# EAGLE board sensor_node_v3 (EAGLE 7.2.0)
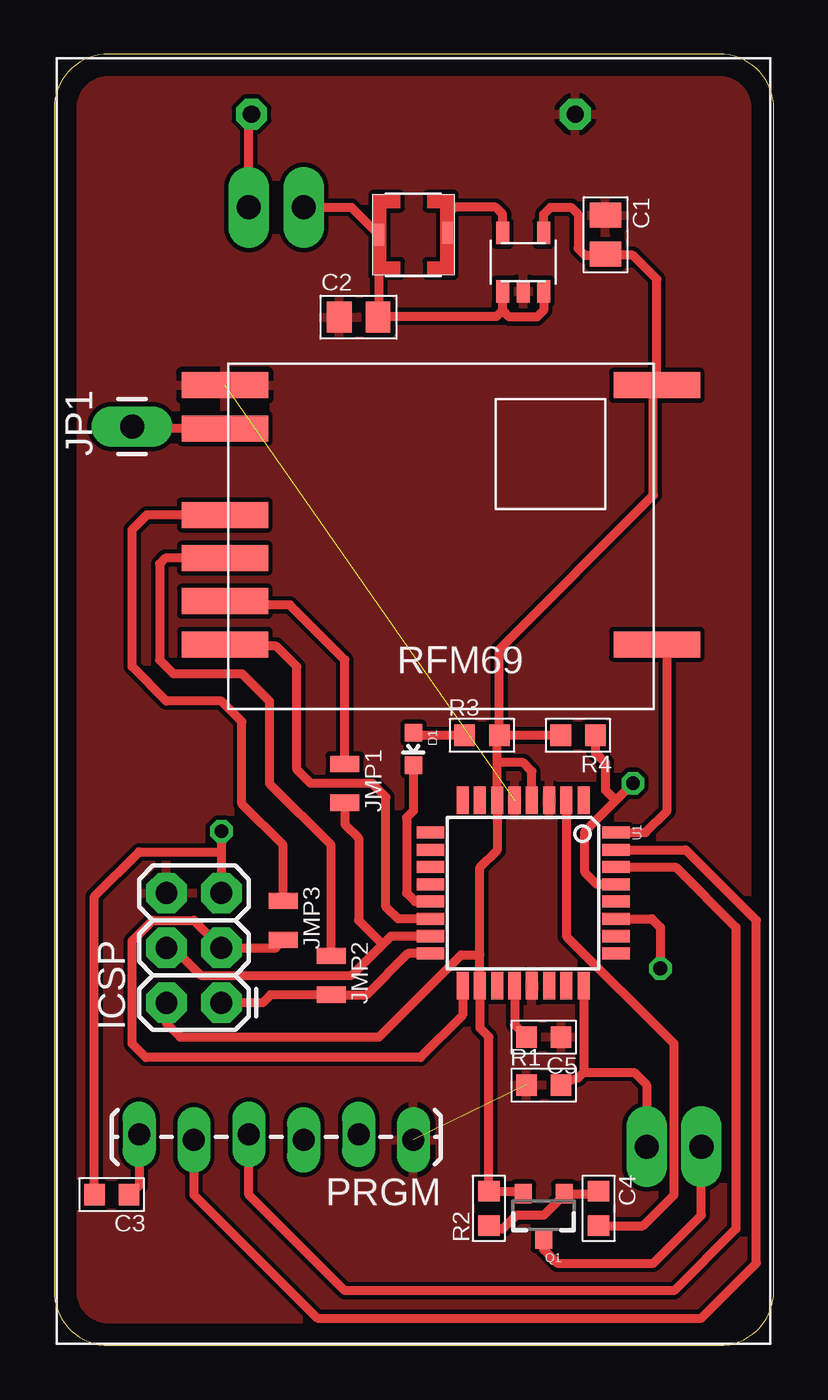
[diagram p0: board, top side]
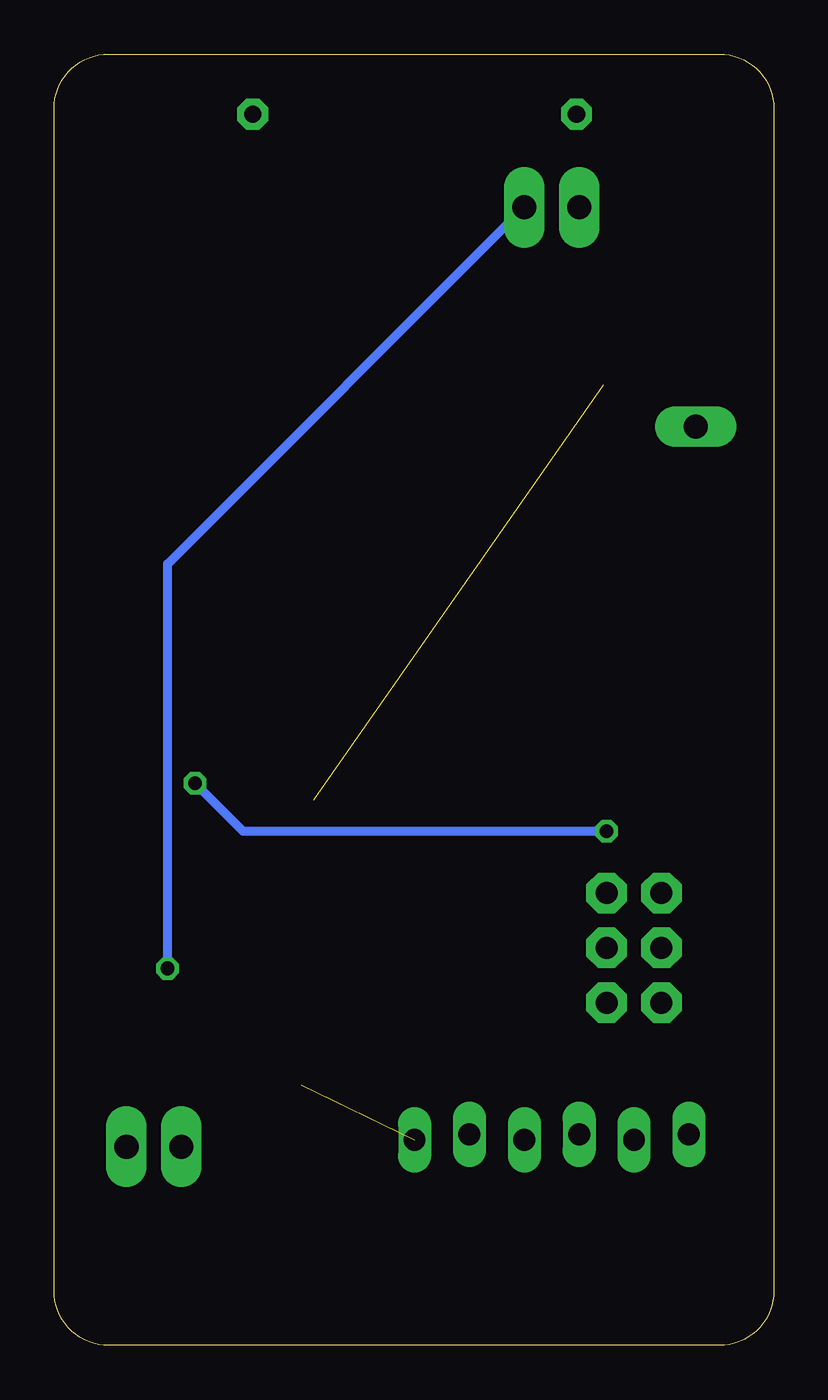
[diagram p1: board, bottom side, seen from below]

Size 33.33 x 59.81 mm. Coordinates in mm from the lower left corner, seen from the top.
Outline: 2.54,0 30.79,0 arc90 33.33,2.54 33.33,57.27 arc90 30.79,59.81 2.54,59.81 arc90 0,57.27 0,2.54 arc90 2.54,0
Copper layers (1*16): Top 0.035mm / dielectric 1.5mm / Bottom 0.035mm
Design rules "default": minimum track width 10mil, minimum drill 24mil, track to track 8mil, track to pad 8mil, pad to pad 8mil, via to via 8mil, smd to smd 8mil, copper to edge 40mil, drill to drill 8mil, minimum pad ring 10mil, minimum via ring 8mil, stop-mask expansion 4mil, vias tented up to drill 0mil, thermal gap 10mil

## Footprints (pad centres in the part's own frame; a part is rotated, then mirrored left to right if it is on the bottom)
C0805-N = smd 1.15 x 1.45: 1 -0.9,0; 2 0.9,0
C0603-N = smd 0.95 x 1: 1 -0.8,0; 2 0.8,0
LED-0603 = smd 0.8 x 0.8: A 0,-0.75; C 0,0.75
2X3 = drill 1.016 pad 1.88 octagon: 1 0,0; 2 0,2.54; 3 2.54,0; 4 2.54,2.54; 5 5.08,0; 6 5.08,2.54
R0805-L = smd 0.75 x 1.35: 1 -0.9,0; 2 0.9,0
1X01_LONGPAD = drill 1.118 pad 1.88 long: 1 0,0
1X02_LONGPADS = drill 1.118 pad 1.88 long: 1 0,0; 2 2.54,0
1X06_LOCK_LONGPADS = drill 1.016 long: 1 0,0; 2 2.54,-0.254; 3 5.08,0; 4 7.62,-0.254; 5 10.16,0; 6 12.7,-0.254
SOT23-3 = smd 0.8 x 0.9: 1 -0.95,-1; 2 0.95,-1; 3 0,1.1
R0603-N = smd 0.95 x 1: 1 -0.8,0; 2 0.8,0
TQFP32-08 = smd 1.27 x 0.559: 1 -4.293,2.8; 2 -4.293,2; 3 -4.293,1.2; 4 -4.293,0.4; 5 -4.293,-0.4; 6 -4.293,-1.2; 7 -4.293,-2; 8 -4.293,-2.8; 17 4.293,-2.8; 18 4.293,-2; 19 4.293,-1.2; 20 4.293,-0.4; 21 4.293,0.4; 22 4.293,1.2; 23 4.293,2; 24 4.293,2.8 | smd 0.559 x 1.27: 9 -2.8,-4.293; 10 -2,-4.293; 11 -1.2,-4.293; 12 -0.4,-4.293; 13 0.4,-4.293; 14 1.2,-4.293; 15 2,-4.293; 16 2.8,-4.293; 25 2.8,4.293; 26 2,4.293; 27 1.2,4.293; 28 0.4,4.293; 29 -0.4,4.293; 30 -1.2,4.293; 31 -2,4.293; 32 -2.8,4.293
KEYSTONEAAHOLDER_2CELL = drill 0.8 pad 1.422 octagon: P$1 -7.493,27.178; P$2 7.493,27.178
SOT23-5 = smd 0.6 x 1.05: P$1 -0.95,-1.35; P$2 0,-1.35; P$3 0.95,-1.35; P$4 0.95,1.35; P$5 -0.95,1.35
COILCRAFT_DO3314 = smd 0.508 x 1.016: P$1 -1.6,-0.1; P$2 1.6,0
RFM69 = smd 4 x 1.2: ANA 10,-5; DIO0 -10,5; GND 10,-7; MISO 10,1; MOSI 10,3; NSS 10,5; SCK 10,-1; VCC -10,-7

## Placement (x,y rotation side)
C1  10uF  [C0805-N]  25.53,51.44 270 top
C2  10uF  [C0805-N]  14.1,47.62 0 top
C3  0.1uF  [C0603-N]  2.67,6.99 180 top
C4  0.1uF  [C0603-N]  25.21,6.35 270 top
C5  0.1uF  [C0603-N]  22.67,14.29 180 top
D1  BLUE  [LED-0603]  16.64,27.62 180 top
ICSP  [2X3]  7.75,15.88 90 top
JMP1  0  [R0805-L]  13.46,26.04 270 top
JMP2  0  [R0805-L]  12.83,17.14 270 top
JMP3  o  [R0805-L]  10.6,19.68 270 top
JP1  M01PTH_LONGPAD  [1X01_LONGPAD]  3.62,42.55 90 top
JP2  THERM  [1X02_LONGPADS]  27.43,9.21 0 top
JP3  PWR_SW  [1X02_LONGPADS]  9.02,52.7 0 top
PRGM  [1X06_LOCK_LONGPADS]  16.64,9.53 180 top
Q1  MOSFET-PCHANNELSMD  [SOT23-3]  22.67,6.03 180 top
R1  10k  [R0603-N]  22.67,12.06 0 top
R2  10k  [R0603-N]  20.13,6.35 90 top
R3  [R0603-N]  19.81,28.26 0 top
R4  10k  [R0603-N]  24.26,28.26 180 top
U1  ATMEGA328P  [TQFP32-08]  21.72,20.95 270 top
U$1  KEYSTONEAAHOLDER_2CELL  [KEYSTONEAAHOLDER_2CELL]  16.64,29.84 0 top
U$2  TPS61097-33  [SOT23-5]  21.72,50.16 0 top
U$3  COILCRAFT_DO3314  [COILCRAFT_DO3314]  16.64,51.44 180 top
U$4  RFM69HW_MIN  [RFM69]  17.91,37.47 180 top

## Library data of the parts
C1-C5 JMP1-JMP3 R1-R4 = passives-7351
D1 = SparkFun-LED; PROD_ID: DIO-08575
ICSP JP1-JP3 PRGM = SparkFun-Connectors
Q1 = SparkFun-DiscreteSemi
U1 = SparkFun-DigitalIC; PROD_ID: IC-09069
U$1-U$3 = myRandomThings
U$4 = hoperf

## Nets
ANT: JP1.1 U$4.ANA
GND: C1.1 C2.1 C5.1 ICSP.6 PRGM.1 R1.1 U1.3 U1.5 U1.21 U$1.P$2 U$2.P$2 U$4.GND
IRQ: U1.32 U$4.DIO0
LED: D1.C U1.13
MISO: ICSP.1 JMP2.2 U1.16
MOSI: ICSP.4 JMP1.2 U1.15
N$1: U$2.P$5 U$3.P$1
N$2: C3.1 PRGM.6
N$3: D1.A R3.1
N$4: JMP1.1 U$4.MOSI
N$5: JMP2.1 U$4.MISO
N$6: JMP3.1 U$4.SCK
N$7: JP3.1 U$1.P$1
N$8: C4.1 Q1.1 R2.1
N$9: C5.2 U1.20
N$11: JP2.2 Q1.3
RST: C3.2 ICSP.5 R4.1 U1.29
RX: PRGM.4 U1.30
SCK: ICSP.3 JMP3.2 U1.17
SS: U1.14 U$4.NSS
THERM: JP2.1 R1.2 U1.24
THERM_EN: C4.2 U1.2
TX: PRGM.5 U1.31
VBAT: C2.2 JP3.2 U1.27 U$2.P$1 U$2.P$3 U$3.P$2
VCC: C1.2 ICSP.2 Q1.2 R2.2 R3.2 R4.2 U1.4 U1.6 U1.18 U$2.P$4 U$4.VCC

## Tracks (layer width: path | path; a pad name or v marks a point on that pad's centre or on a via)
ANT
  Top 0.406: U$4.ANA 3.7,42.47 JP1.1
GND  (2 unrouted)
  pour Top: -1.14,-0.64 34.42,-0.64 34.42,60.33 -1.14,60.33
IRQ
  Top 0.406: U1.32 27.38,23.75 28.38,24.77 28.38,32.31 U$4.DIO0
LED
  Top 0.406: D1.C 16.64,24.77 16.32,24.45 16.32,20.95 16.72,20.55 U1.13
MISO
  Top 0.406: U1.16 16.38,18.16 14.47,16.25 JMP2.2 10.02,16.25 9.65,15.88 ICSP.1
MOSI
  Top 0.406: ICSP.4 5.52,18.41 6.79,17.14 13.78,17.14 15.21,18.57 | 15.21,18.57 15.59,18.95 U1.15 | JMP1.2 13.46,24.13 14.1,23.5 14.1,19.68 15.21,18.57
N$1
  Top 0.406: U$2.P$5 20.77,52.38 20.45,52.7 18.54,52.7 18.22,52.39 18.22,51.55 U$3.P$1
N$2
  Top 0.406: PRGM.6 3.94,7.41 C3.1
N$3
  Top 0.406: R3.1 17.07,28.26 D1.A
N$4
  Top 0.406: JMP1.1 13.46,31.75 10.92,34.29 8.08,34.29 U$4.MOSI
N$5
  Top 0.406: U$4.MISO 5.16,36.47 4.89,36.2 4.89,31.75 5.52,31.11 8.7,31.11 9.97,29.84 9.97,26.04 12.83,23.18 JMP2.1
N$6
  Top 0.406: JMP3.1 10.6,23.18 8.7,25.08 8.7,28.89 7.75,29.84 5.21,29.84 3.62,31.43 3.62,37.78 4.3,38.47 U$4.SCK
N$7
  Top 0.406: JP3.1 9.02,56.9 U$1.P$1
N$8
  Top 0.406: R2.1 20.28,5.4 20.77,5.4 21.4,6.03 22.67,6.03 23.62,6.98 Q1.1 25,7.03 C4.1
N$9
  Top 0.406: U1.20 21.32,14.84 C5.2
N$11
  Top 0.406: Q1.3 22.67,4.45 23.3,3.81 27.75,3.81 29.97,6.03 JP2.2
RST  (via drill 0.64)
  Top 0.406: U1.29 25.13,21.36 24.57,21.91 24.57,23.81 26,25.24 | v7.75,23.81 7.75,22.86 | 7.75,22.86 ICSP.5 | 26,25.24 v26.8,26.04 | R4.1 25.06,27.46 25.53,26.99 25.53,25.72 26,25.24 | C3.2 1.87,20.79 3.94,22.86 7.75,22.86
  Bottom 0.406: v7.75,23.81 24.57,23.81 v26.8,26.04
RX
  Top 0.406: U1.30 28.77,22.16 31.56,19.37 31.56,5.4 28.7,2.54 13.46,2.54 9.02,6.99 PRGM.4
SCK
  Top 0.406: U1.17 18.92,15.3 16.95,13.34 4.25,13.34 3.62,13.97 3.62,18.73 4.57,19.68 6.48,19.68 ICSP.3 10.29,18.41 10.29,18.47 JMP3.2
SS
  Top 0.406: U1.14 15.93,19.75 15.37,20.32 15.37,25.4 14.73,26.04 11.87,26.04 11.24,26.67 11.24,31.43 10.29,32.38 7.99,32.38 U$4.NSS
THERM
  Top 0.406: JP2.1 27.43,12.06 26.86,12.64 24.52,12.64 | U1.24 24.52,12.64 | 24.52,12.64 24.26,12.38 R1.2
THERM_EN
  Top 0.406: C4.2 27.27,5.55 28.7,6.99 28.7,13.97 23.72,18.95 U1.2
TX
  Top 0.406: PRGM.5 6.48,6.99 12.19,1.27 29.97,1.27 32.51,3.81 32.51,19.68 29.24,22.95 U1.31
VBAT  (via drill 0.64)
  Top 0.406: JP3.2 13.77,52.7 U$3.P$2 15.04,47.66 | 15.04,47.66 C2.2 | U1.27 27.68,19.75 28.07,19.37 v28.07,17.46 | 15.04,47.66 20.49,47.66 20.77,47.94 | 20.77,47.94 U$2.P$1 | U$2.P$3 22.67,47.94 22.35,47.62 21.08,47.62 20.77,47.94
  Bottom 0.406: v28.07,17.46 28.07,36.2 JP3.2
VCC
  Top 0.406: U$2.P$4 22.67,52.38 22.99,52.7 23.94,52.7 24.26,52.39 24.26,50.8 24.57,50.48 25.47,50.48 C1.2 25.58,50.48 26.8,50.48 27.91,49.37 U$4.VCC 27.75,44.31 27.75,39.37 20.61,32.23 R3.2 | 20.52,26.99 U1.6 20.52,22.93 19.72,22.13 19.72,18.1 | 20.52,26.99 20.52,28.16 R3.2 | 19.72,18.1 U1.18 19.72,14.7 20.13,14.29 R2.2 21.6,7.15 Q1.2 | U1.4 22.12,26.59 21.72,26.99 20.52,26.99 | ICSP.2 5.21,14.92 5.84,14.29 15.05,14.29 18.86,18.1 19.72,18.1 | R4.2 R3.2